# EAGLE board EMS4ChibaRobo (EAGLE 9.6.2)
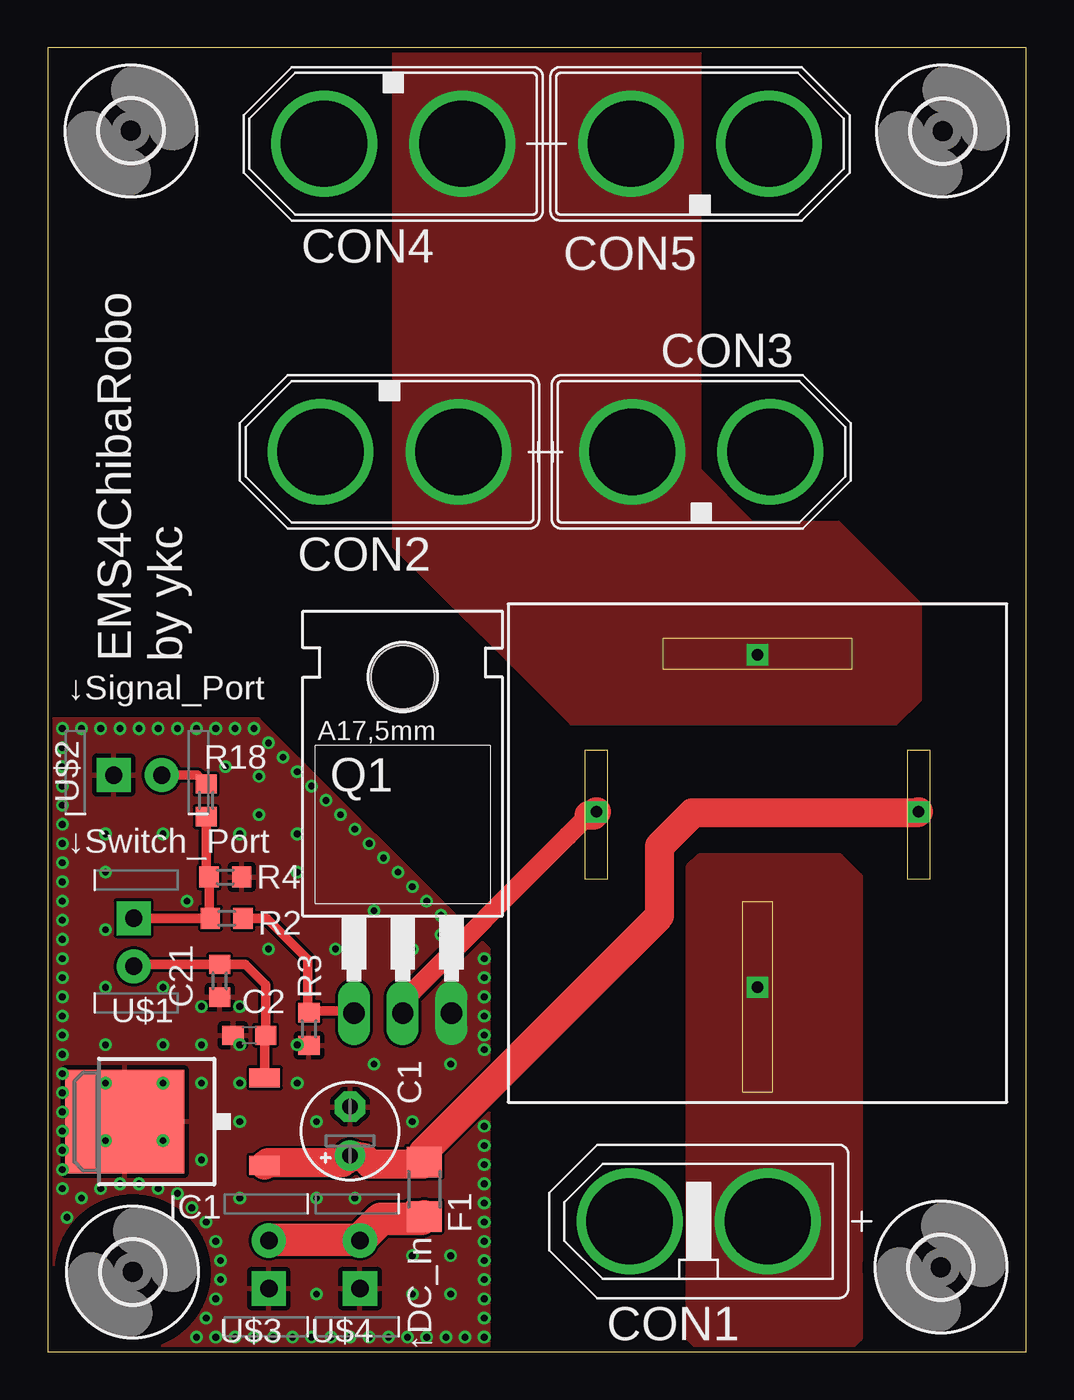
[diagram p0: board, top side]
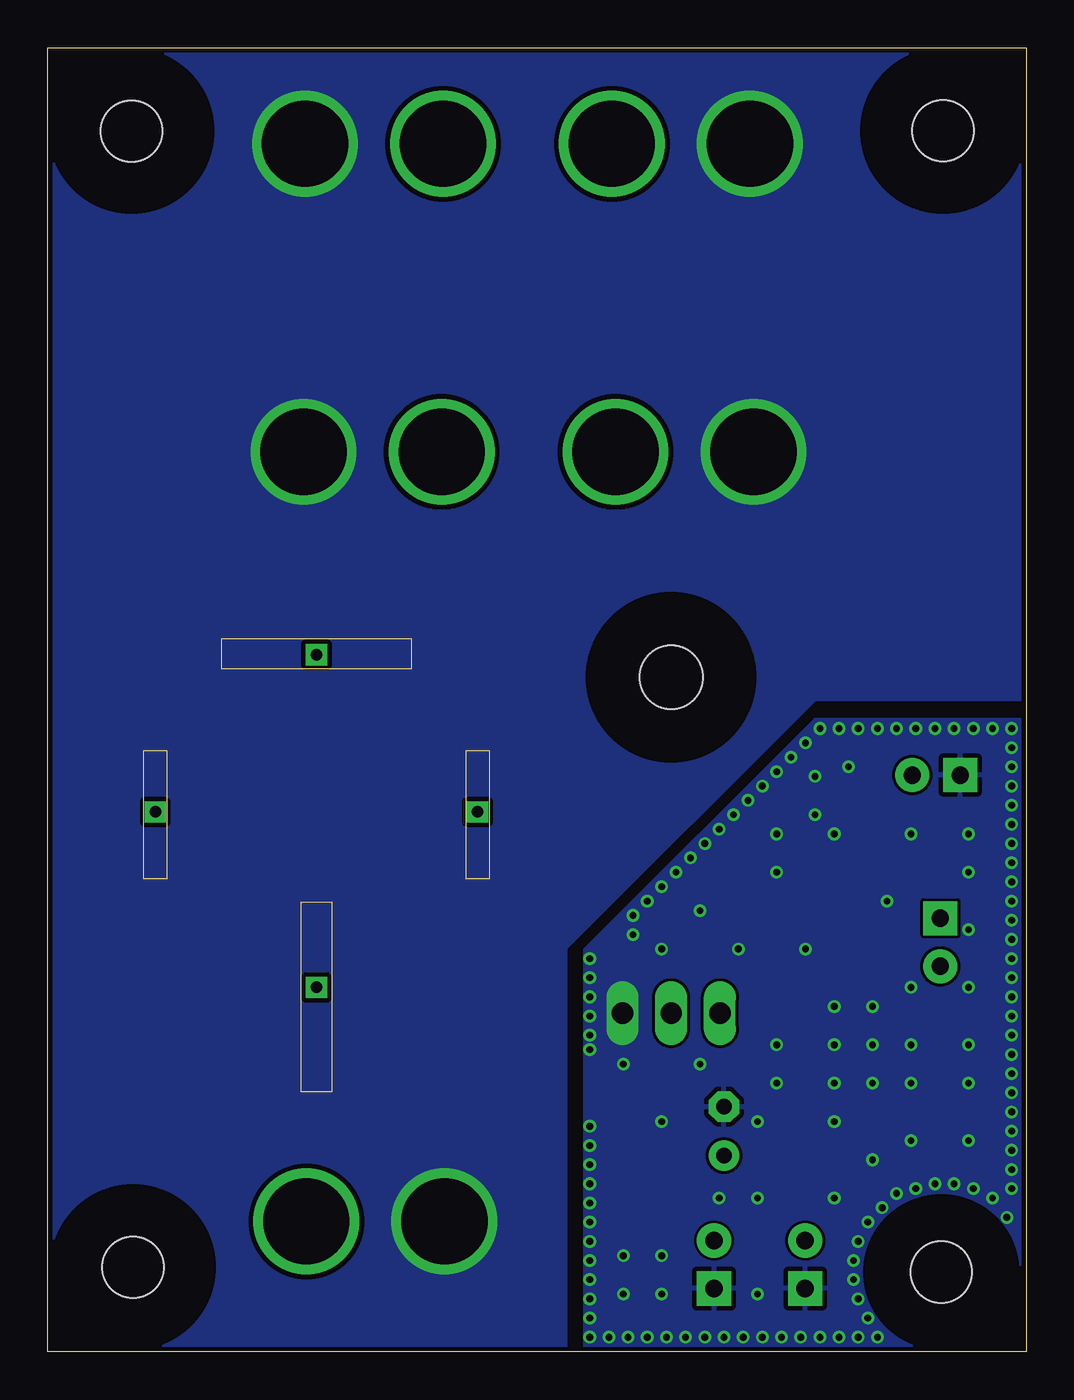
[diagram p1: board, bottom side, seen from below]

Size 51 x 68 mm. Coordinates in mm from the lower left corner, seen from the top.
Outline: 0,0 51,0 51,68 0,68 0,0
Copper layers (1*16): Top 0.035mm / dielectric 1.5mm / Bottom 0.035mm
Design rules "SeeedStudio_2layer_DRU_no_angle_20140221": minimum track width 6mil, minimum drill 12mil, track to track 6mil, track to pad 6mil, pad to pad 6mil, via to via 6mil, smd to smd 0mil, copper to edge 10mil, drill to drill 10mil, minimum pad ring 10mil, minimum via ring 6mil, stop-mask expansion 2mil, vias tented up to drill 100mil, thermal gap 10mil
Net classes: 1 12v: width 1.5 mm; 2 log_out: width 1.7 mm

## Footprints (pad centres in the part's own frame; a part is rotated, then mirrored left to right if it is on the bottom)
E2,5-5 = drill 0.813 pad 1.6: + -1.27,0 | drill 0.813 pad 1.6 octagon: - 1.27,0
C0603 = smd 1.1 x 1: 1 -0.85,0; 2 0.85,0
C0603' = smd 1 x 1.1: 1 -0.85,0; 2 0.85,0
XT60PB-F = drill 4.5: + 3.6,0; - -3.6,0
XT60PB-M = drill 4.5: + 3.6,0; - -3.6,0
R1206 = smd 1.6 x 1.803: 1 -1.422,0; 2 1.422,0
3,2 = hole 3.2: 0,0
TO252 = smd 1 x 1.6: 1 -2.28,-4.8; 2 2.28,-4.8 | smd 5.4 x 6.2: 3 0,2.5
TO220BH = drill 1.118 long: D 0,-6.35; G -2.54,-6.35; S 2.54,-6.35 | hole 3.302: 0,11.176
R0603 = smd 1 x 1.1: 1 -0.85,0; 2 0.85,0
897-1AH-C-001 = drill 0.6 square: P$1 0,-7; P$2 8.4,2.15; P$3 -8.4,2.15; P$4 0,10.35
CON-XH-2-STRAIGHT = drill 0.9 pad 1.778 square: P$1 1.21,-0.73 | drill 0.9 pad 1.778: P$2 -1.29,-0.73

## Placement (x,y rotation side)
C1  22u  [E2,5-5]  15.75,11.5 90 top
C2  100n  [C0603]  10.5,16.5 180 top
C21  100n  [C0603']  8.95,19.34 90 top
CON1  XT60PB-F  [XT60PB-F]  33.93,6.79 0 top
CON2  XT60PB-M  [XT60PB-M]  17.81,46.93 0 top
CON3  XT60PB-M  [XT60PB-M]  34.07,46.93 180 top
CON4  XT60PB-M  [XT60PB-M]  18,63 0 top
CON5  XT60PB-M  [XT60PB-M]  34,63 180 top
F1  [R1206]  19.62,8.47 90 top
H1  MOUNT-HOLE3.2  [3,2]  4.33,63.68 0 top
H2  MOUNT-HOLE3.2  [3,2]  46.65,63.66 0 top
H3  MOUNT-HOLE3.2  [3,2]  46.56,4.4 0 top
H4  MOUNT-HOLE3.2  [3,2]  4.42,4.15 0 top
IC1  7805DT  [TO252]  6.5,12 90 top
Q1  BUZ11BH  [TO220BH]  18.5,24 0 top
R2  100R  [R0603]  9.32,22.6 0 top
R3  100k  [R0603]  13.61,16.83 270 top
R4  100k  [R0603]  9.25,24.75 0 top
R18  1k  [R0603]  8.25,28.75 270 top
S1  897-1AH-C-001  [897-1AH-C-001]  37,26 0 top
U$1  XH-2-STRAIGHT  [CON-XH-2-STRAIGHT]  3.74,21.39 90 top
U$2  XH-2-STRAIGHT  [CON-XH-2-STRAIGHT]  4.64,29.34 180 top
U$3  XH-2-STRAIGHT  [CON-XH-2-STRAIGHT]  12.25,4.5 270 top
U$4  XH-2-STRAIGHT  [CON-XH-2-STRAIGHT]  17,4.5 270 top

## Library data of the parts
C1 C2 = rcl; SPICEPREFIX: C
C21 = rcl
CON1-CON5 = amass
F1 R2-R4 R18 = rcl; SPICEPREFIX: R
H1-H4 = holes
IC1 = linear
Q1 = transistor-power
S1 = relay
U$1-U$4 = con-xh

## Nets
!EMS: R2.1 R4.1 R18.2 U$1.P$1
!EMS1: R18.1 U$2.P$2
+5V: C2.1 C21.2 IC1.2 U$1.P$2
+12V [12v]: C1.+ F1.2 IC1.1 S1.P$2
BATT_POWER: CON1.+ S1.P$1
GND2: CON1.- CON2.- CON3.- CON4.- CON5.-
GNDIO: C1.- C2.2 C21.1 IC1.3 Q1.S R3.2 R4.2 U$2.P$1 U$3.P$1 U$4.P$1
LOG_OUT [log_out]: F1.1 U$3.P$2 U$4.P$2
N$1: Q1.D S1.P$3
N$7: Q1.G R2.2 R3.1
OUT_POWER_A: CON2.+ CON3.+ CON4.+ CON5.+ S1.P$4

## Tracks (layer width: path | path; a pad name or v marks a point on that pad's centre or on a via)
!EMS
  Top 0.5: R2.1 8.13,22.6 8.12,22.6 U$1.P$1
  Top 0.508: R18.2 8.25,24.9 R4.1 8.4,22.88 8.12,22.6
!EMS1
  Top 0.508: U$2.P$2 7.78,30.07 R18.1
+5V
  Top 0.5: IC1.2 11.3,16.45 C2.1 11.35,19.12 10.28,20.19 C21.2 4.56,20.19 U$1.P$2
+12V
  Top 1.5: IC1.1 11.42,9.79 11.48,9.85 15.37,9.85 C1.+ 16.47,10.11 16.8,9.79 19.57,9.79 F1.2 19.58,10.43 31.89,22.73 31.89,26.36 33.62,28.1 45.35,28.1 S1.P$2
BATT_POWER
  pour Top (no thermals): 33.5,0.75 33.5,25.25 34,25.75 41.25,25.75 42.25,24.75 42.25,0.75 41.5,0 34.25,0
GND2
  pour Bottom (isolate 0.254, no thermals): 0,34 11,34 24,21 24,0 51,0 51,68 0,68
GNDIO  (via drill 0.35)
  other vias: 7.75,0.75 8.75,0.75 9.75,0.75 10.75,0.75 11.75,0.75 12.75,0.75 13.75,0.75 14.75,0.75 15.75,0.75 16.75,0.75 17.75,0.75 18.75,0.75 19.75,0.75 20.75,0.75 21.75,0.75 22.75,0.75 22.75,1.75 22.75,2.75 22.75,3.75 22.75,4.75 22.75,5.75 22.75,6.75 22.75,7.75 22.75,15.75 22.75,11.75 22.75,10.75 22.75,9.75 22.75,8.75 22.75,20.5 22.75,19.5 22.75,18.5 22.75,17.5 22.75,16.5 20.5,21.75 20.5,22.75 19.75,23.5 19,24.25 18.25,25 17.5,25.75 16.75,26.5 16,27.25 15.25,28 14.5,28.75 13.75,29.5 13,30.25 12.25,31 11.5,31.75 10.75,32.5 9.75,32.5 8.75,32.5 7.75,32.5 6.75,32.5 5.75,32.5 4.75,32.5 3.75,32.5 2.75,32.5 1.75,32.5 0.75,32.5 0.75,31.5 0.75,30.5 0.75,29.5 0.75,28.5 0.75,27.5 0.75,26.5 0.75,25.5 0.75,24.5 0.75,23.5 0.75,22.5 0.75,21.5 0.75,20.5 0.75,19.5 0.75,18.5 0.75,17.5 0.75,16.5 0.75,15.5 0.75,14.5 0.75,13.5 0.75,12.5 0.75,11.5 0.75,10.5 0.75,9.5 0.75,8.5 1,7 1.75,8 8.25,1.75 8.75,2.75 9,3.75 9,4.75 8.75,5.75 8.25,6.75 7.5,7.5 6.75,8.25 5.75,8.5 4.75,8.75 3.75,8.75 2.75,8.5 3,14 6,14 6,11 3,11 19,3 21,3 21,5 19,5 14,3 10,8 14,8 16,8 8,10 10,12 14,12 19,12 21,15 17,15 13,14 13,16 10,16 10,14 8,14 6,16 3,16 3,27 6,27 3,19 3,25 11,28 10,27 13,25 13,27 11,30 9.25,30.5 11.5,21 8,16 7.25,23.5 3,22 8,18 6,19 15,21 19,21 17,23 10,18
  pour Top: 0,0 23,0 23,21 11,33 0,33
  pour Bottom: 0,0 23,0 23,21 11,33 0,33
LOG_OUT
  Top 1.7: F1.1 19.5,6.93 17.36,6.93 16.31,5.87 | 16.31,5.87 16.28,5.84 11.56,5.84 U$3.P$2 | 16.31,5.87 U$4.P$2
N$1
  Top 0.61: Q1.D 18.5,18.27
  Top 1.016: 28.21,27.99 27.11,26.89 18.5,18.27
  Top 1.5: S1.P$3 28.44,27.99 28.21,27.99
N$7
  Top 0.5: Q1.G 15.82,17.78 13.7,17.78 R3.1 13.54,17.94 13.54,20.46 11.4,22.6 R2.2
OUT_POWER_A
  pour Top (no thermals): 18,68 18,42 27.25,32.75 44.25,32.75 45.5,34 45.5,39 41.25,43.25 36.75,43.25 34,46 34,68

## Text on the board
tPlace: EMS4ChibaRobo / by ykc | ↓Signal_Port | ↓Switch_Port | ↑DC_In